# Altium PCB FMCWRadar.PcbDoc (part 2 of 5)
Units mil, origin at the board's own origin, x right, y up, seen from the top; angles counter-clockwise.
Board outline 4763.78 x 3464.57 mil, 6 copper layers (L1, L2(GND), L3, L4, L5(GND), L6), stack 32.112 mil thick; 306 components, 195 nets, 1057 pads, 1126 vias.
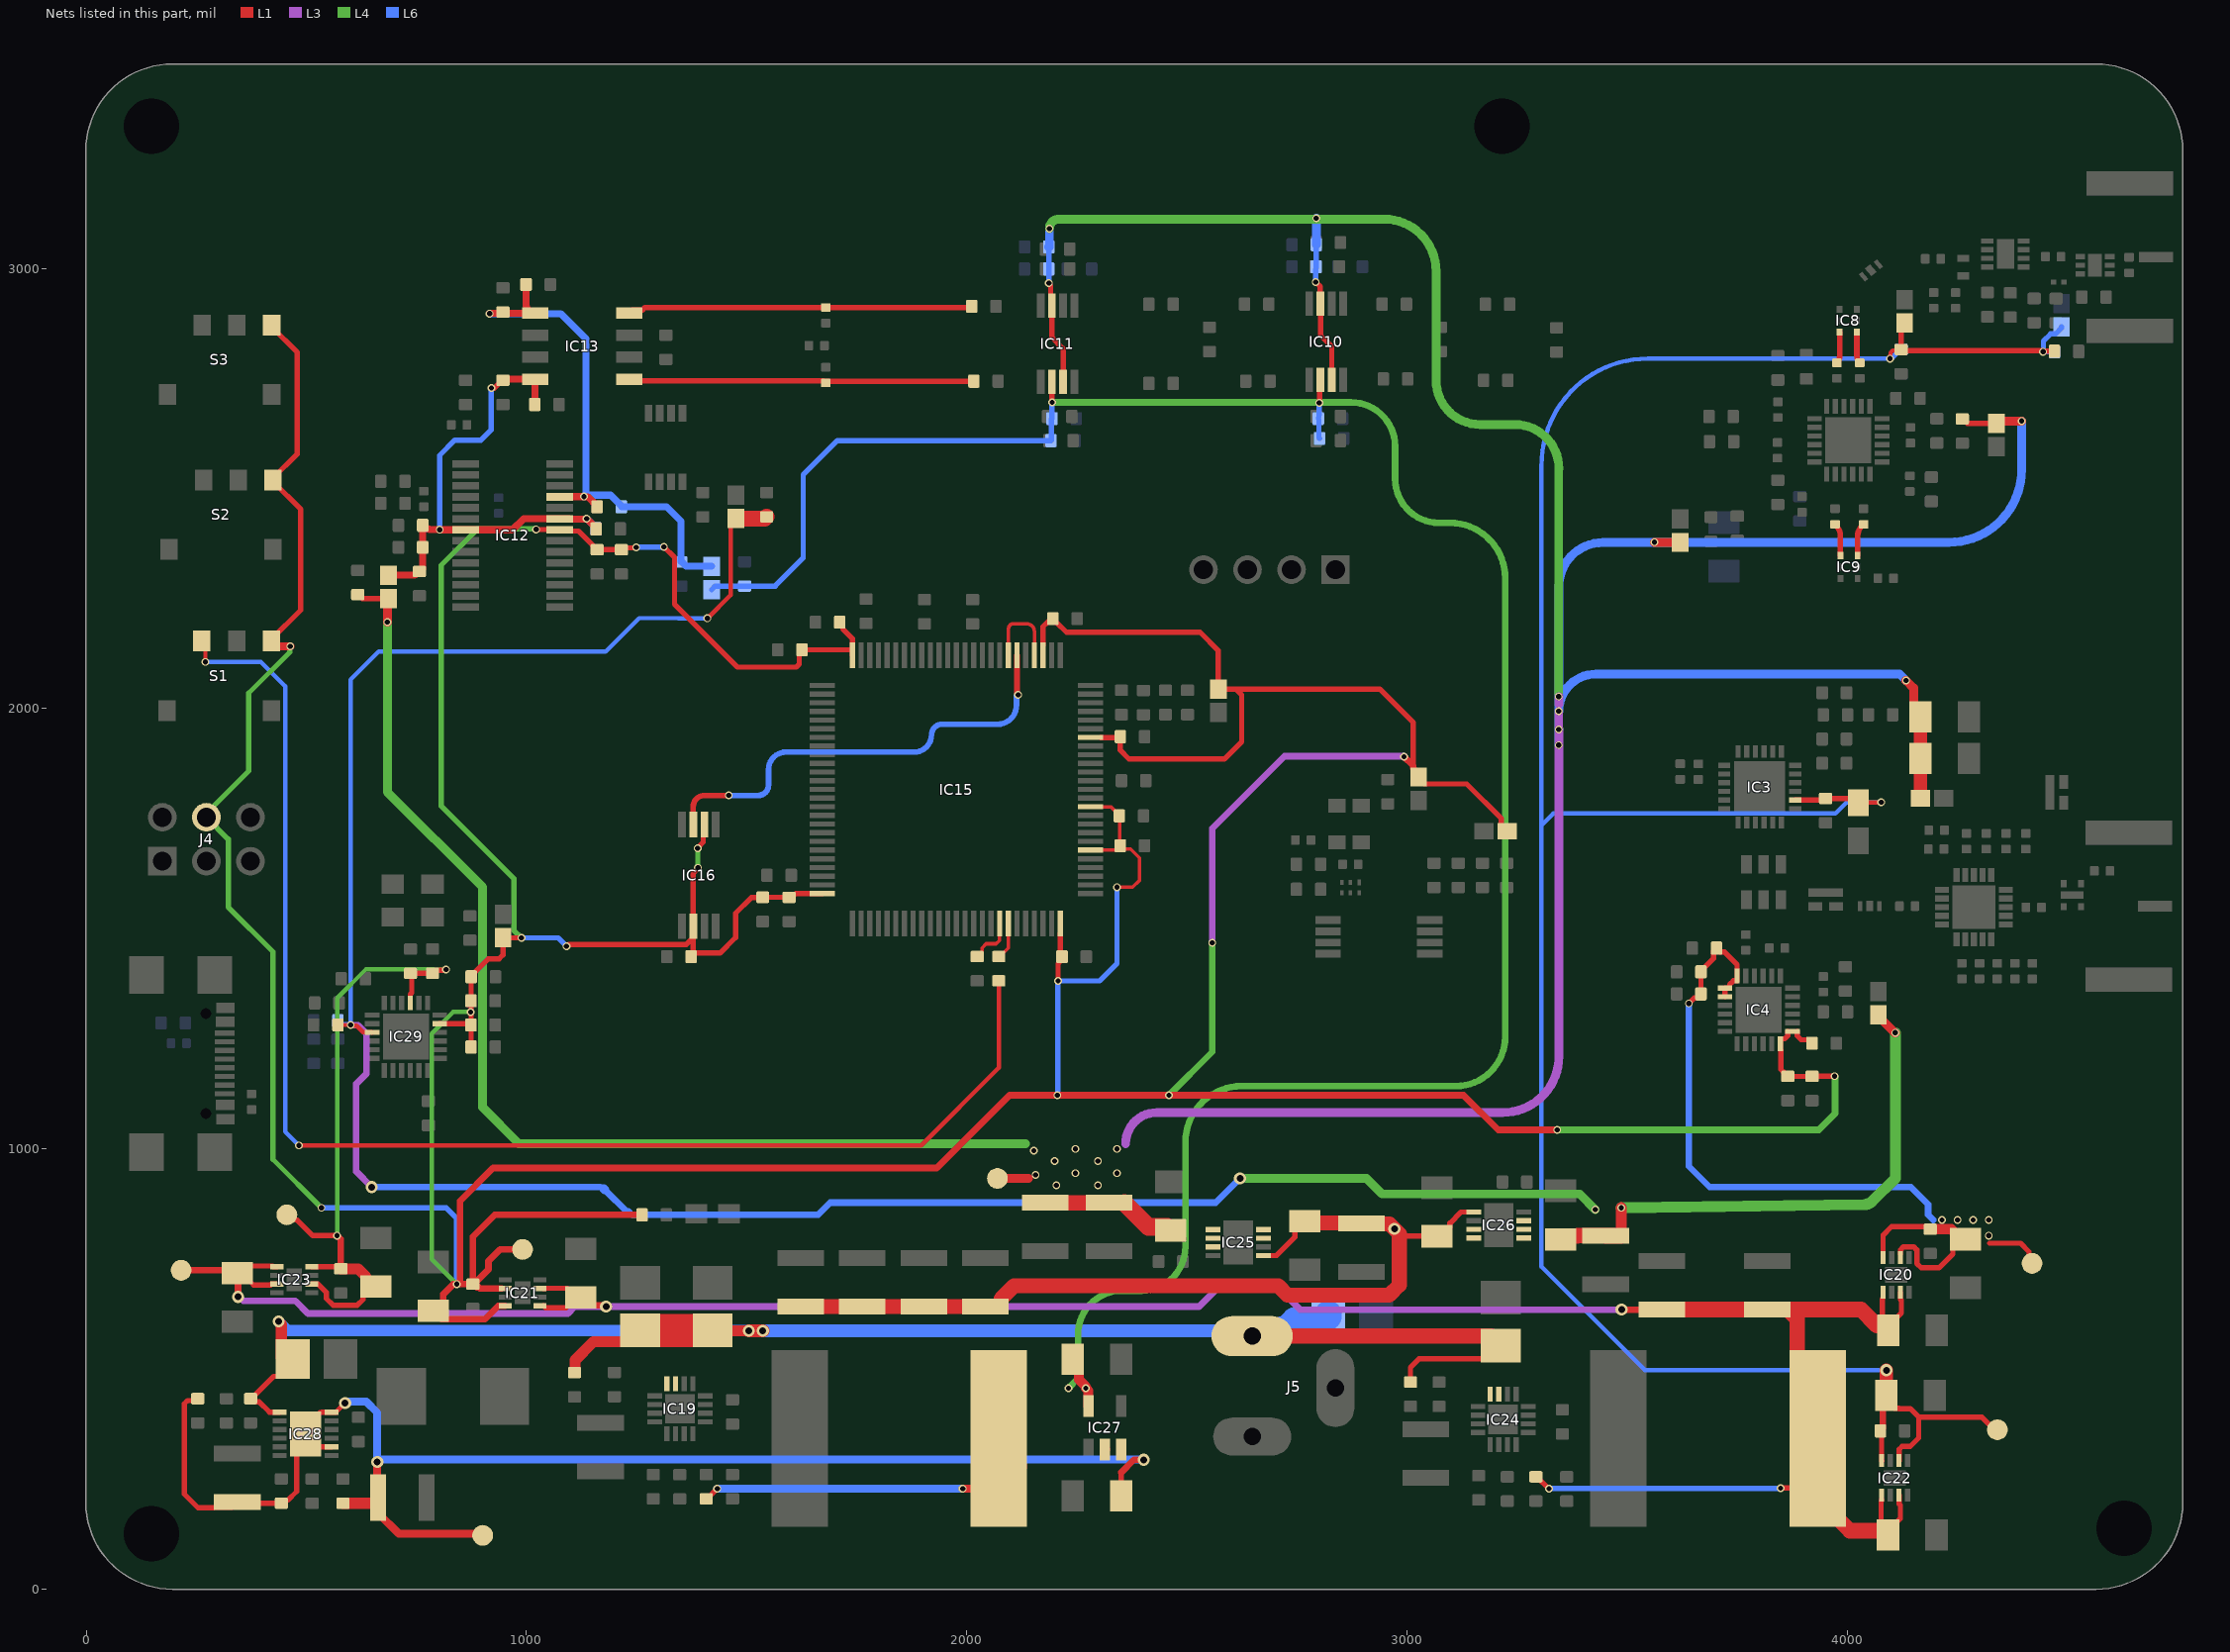
[diagram p6: the nets of this part, all layers, seen from the top]

## Part data (continued)
C14 C21 C22 C24 C25 C28 C30 C32 C37 C42 C43 C46 C47 C51 C52 C58 C74 C75 C78 C79 C82 C83 C84 C86 C89 C92 C95 C101 C102 C103 C104 C105 C106 C107 C108 C109 C116 C117 C119 C120 C123 C128 C148 C167 C171 C173 C175 C177 C179 C181: library part CMP-001-00055-4, "Chip Capacitor, 1µF +/-0.1%, 25V, 0603, Thickness 1 mm", Case/Package=0603, Manufacturer Part No=0603X104K250CT, Max Operating Temperature=85°C, Min Operating Temperature=-55°C, Mouser Part No=791-0603X104K250CT, Tolerance=20%, Voltage Rating=25V, Mounting Technology=SMT, Pins=2
C15 C23 C26: library part CMP-001-00055-4, "Chip Capacitor, 1µF +/-0.1%, 25V, 0603, Thickness 1 mm", Case/Package=0603, Manufacturer Part No=VJ0603A100JXBAP, Max Operating Temperature=85°C, Min Operating Temperature=-55°C, Mouser Part No=77-VJ0603A100JXBAP, Tolerance=20%, Voltage Rating=25V, Mounting Technology=SMT, Pins=2
C16: library part CMP-001-00042-7, "Tantalum Capacitors - Solid SMD 20V 4.7uF 1206 10% ESR=4ohms", Capacitor Type=Tantalum, Case/Package=1206, Manufacturer=AVX, Manufacturer Part No=T491A475K020AT, Max Operating Temperature=125°C, Min Operating Temperature=-55°C, Mouser Part No=80-T491A475K020, Package Description="2-Pin Surface Mount Device, Body 3.2 x 1.65 mm", Package Quantity=2000, Package Reference=TAJ-A-2, Resistance=4Ohm, Tolerance=10%, Voltage Rating=16V, Datasheet Version=Feb-16, ESR=4Ohm, Mounting Technology=SM, Packaging=TapeandReel, RoHS Compliant=True
C17 C133 C135 C141 C143: library part CMP-001-00055-4, "Multilayer Ceramic Capacitors MLCC - SMD/SMT 0603 10nF 16volts X7R 10%", Case/Package=0603, Manufacturer Part No=VJ0603Y103KXJAC31X, Max Operating Temperature=85°C, Min Operating Temperature=-55°C, Mouser Part No=77-V0603Y103KXJAC31X, Tolerance=20%, Voltage Rating=25V, Mounting Technology=SMT, Pins=2
C18: library part CMP-001-00055-4, "Multilayer Ceramic Capacitors MLCC - SMD/SMT Cap Cer 0603 12nF 16VDC X8G 1%", Case/Package=0603, Manufacturer Part No=C0603C123F4TACTU, Max Operating Temperature=85°C, Min Operating Temperature=-55°C, Mouser Part No=80-C0603C123F4TACTU, Tolerance=20%, Voltage Rating=25V, Mounting Technology=SMT, Pins=2
C19: library part CMP-001-00055-4, "Multilayer Ceramic Capacitors MLCC - SMD/SMT 10V .15uF X7R 0603 5 %", Case/Package=0603, Manufacturer Part No=0603ZC154JAT2A, Max Operating Temperature=85°C, Min Operating Temperature=-55°C, Mouser Part No=581-0603ZC154JAT2A, Tolerance=20%, Voltage Rating=25V, Mounting Technology=SMT, Pins=2
C20: library part CMP-001-00055-4, "Chip Capacitor, 1µF +/-0.1%, 25V, 0603, Thickness 1 mm", Case/Package=0603, Manufacturer Part No=06033C562JAT2A, Max Operating Temperature=85°C, Min Operating Temperature=-55°C, Mouser Part No=581-06033C562J, Tolerance=20%, Voltage Rating=25V, Mounting Technology=SMT, Pins=2
C27 C29 C31 C34 C41 C49 C50 C72 C73 C76 C77 C114 C115 C118 C121 C170 C172 C176 C180: library part CMP-001-00055-4, "Multilayer Ceramic Capacitors MLCC - SMD/SMT 0603 10nF 16volts X7R 10%", Case/Package=0603, Manufacturer Part No=VJ0603G225KXQCW1BC, Max Operating Temperature=85°C, Min Operating Temperature=-55°C, Mouser Part No=77-VJ0603G225KXQCWBC, Tolerance=20%, Voltage Rating=25V, Mounting Technology=SMT, Pins=2
C33 C62 C63 C70 C71: library part CMP-001-00055-4, "Chip Capacitor, 1µF +/-0.1%, 25V, 0603, Thickness 1 mm", Case/Package=0603, Manufacturer Part No=06033A101GAT2A, Max Operating Temperature=85°C, Min Operating Temperature=-55°C, Mouser Part No=581-06033A101GAT2A, Tolerance=20%, Voltage Rating=25V, Mounting Technology=SMT, Pins=2
C35: library part CMP-001-00071-4, "Multilayer Ceramic Capacitors MLCC - SMD/SMT 50 V 10 pF C0G 0402 1%", Case/Package=0402, Manufacturer Part No=CQ0402FRNPO9BN100, Max Operating Temperature=85°C, Min Operating Temperature=-55°C, Mouser Part No=603-CQ0402FRNPO9BN10, Tolerance=20%, Voltage Rating=50V, Mounting Technology=SMT, Pins=2
C36 C88 C122: library part CMP-001-00071-4, "Multilayer Ceramic Capacitors MLCC - SMD/SMT 50 V 10 pF C0G 0402 1%", Case/Package=0402, Manufacturer Part No=VJ0402Y103JXJAC, Max Operating Temperature=85°C, Min Operating Temperature=-55°C, Mouser Part No=77-VJ0402Y103JXJAC, Tolerance=20%, Voltage Rating=50V, Mounting Technology=SMT, Pins=2
C40: library part CMP-001-00071-4, "Multilayer Ceramic Capacitors MLCC - SMD/SMT 50 V 10 pF C0G 0402 1%", Case/Package=0402, Manufacturer Part No=04025A0R5BAT4A, Max Operating Temperature=85°C, Min Operating Temperature=-55°C, Mouser Part No=581-04025A0R5BAT4A, Tolerance=20%, Voltage Rating=50V, Mounting Technology=SMT, Pins=2
C55 C56: library part CMP-001-00055-4, "Multilayer Ceramic Capacitors MLCC - SMD/SMT 25V 0.082uF X7R 0603 5%", Case/Package=0603, Manufacturer Part No=C0603C823J3RACTU, Max Operating Temperature=85°C, Min Operating Temperature=-55°C, Mouser Part No=80-C0603C823J3R, Tolerance=20%, Voltage Rating=25V, Mounting Technology=SMT, Pins=2
C64 C67: library part CMP-001-00055-4, "Chip Capacitor, 1µF +/-0.1%, 25V, 0603, Thickness 1 mm", Case/Package=0603, Manufacturer Part No=VJ0603Y332JXBAC, Max Operating Temperature=85°C, Min Operating Temperature=-55°C, Mouser Part No=77-VJ0603Y332JXBAC, Tolerance=20%, Voltage Rating=25V, Mounting Technology=SMT, Pins=2
C65: library part CMP-001-00055-4, "Chip Capacitor, 1µF +/-0.1%, 25V, 0603, Thickness 1 mm", Case/Package=0603, Manufacturer Part No=C0603C271J1GACAUTO, Max Operating Temperature=85°C, Min Operating Temperature=-55°C, Mouser Part No=80-C0603C271J1GAUTO, Tolerance=20%, Voltage Rating=25V, Mounting Technology=SMT, Pins=2
C66: library part CMP-001-00055-4, "Chip Capacitor, 1µF +/-0.1%, 25V, 0603, Thickness 1 mm", Case/Package=0603, Manufacturer Part No=C0603C302K5GACTU, Max Operating Temperature=85°C, Min Operating Temperature=-55°C, Mouser Part No=80-C0603C302K5G, Tolerance=20%, Voltage Rating=25V, Mounting Technology=SMT, Pins=2
C68 C69 C80 C81 C85 C87 C91 C93 C94 C96 C110 C111 C174 C178: library part CMP-001-00055-4, "Chip Capacitor, 1µF +/-0.1%, 25V, 0603, Thickness 1 mm", Case/Package=0603, Manufacturer Part No=0603YC105KAZ2A, Max Operating Temperature=85°C, Min Operating Temperature=-55°C, Mouser Part No=581-0603YC105KAZ2A, Tolerance=20%, Voltage Rating=25V, Mounting Technology=SMT, Pins=2
C90 C97 C98 C99 C100: library part CMP-001-00055-4, "Chip Capacitor, 1µF +/-0.1%, 25V, 0603, Thickness 1 mm", Case/Package=0603, Manufacturer Part No=06033D475KAT2A, Max Operating Temperature=85°C, Min Operating Temperature=-55°C, Mouser Part No=581-06033D475KAT2A, Tolerance=20%, Voltage Rating=25V, Mounting Technology=SMT, Pins=2
C112 C113: library part CMP-001-00055-4, "Chip Capacitor, 1µF +/-0.1%, 25V, 0603, Thickness 1 mm", Case/Package=0603, Manufacturer Part No=C0603C475K8PAC7867, Max Operating Temperature=85°C, Min Operating Temperature=-55°C, Mouser Part No=80-C0603C475K8P7867, Tolerance=20%, Voltage Rating=25V, Mounting Technology=SMT, Pins=2
C124: library part CMP-001-00071-4, "Multilayer Ceramic Capacitors MLCC - SMD/SMT 50 V 3 pF 0.1 pF C0G (NP0) 0402 - 55 C + 125 C", Case/Package=0402, Manufacturer Part No=GRM155R71E223KA61D, Max Operating Temperature=85°C, Min Operating Temperature=-55°C, Mouser Part No=81-GRM155R71E223KA6D, Tolerance=20%, Voltage Rating=50V, Mounting Technology=SMT, Pins=2
C125 C126: library part CMP-001-00043-7, "Tantalum Capacitors - Solid SMD 20V 10uF 10% 1210 ES R = 2.1 Ohm", Capacitor Type=Tantalum, Case/Package=1210, Manufacturer=AVX, Manufacturer Part No=TAJB106K020SNJ, Max Operating Temperature=125°C, Min Operating Temperature=-55°C, Mouser Part No=581-TAJB106K020SNJ, Package Description="2-Pin Surface Mount Device, Body 3.5 x 2.85 mm", Package Quantity=2000, Package Reference=TAJ-B-2, Resistance=2.8Ohm, Tolerance=10%, Voltage Rating=16V, Datasheet URL=http://datasheets.avx.com/TAJ.pdf, Datasheet Version=Feb-16, ESR=2.8Ohm, Manufacturer URL=http://www.avx.com/, Mounting Technology=SM, Packaging=TapeandReel, Pins=2, RoHS Compliant=True
C127 C147 C159: library part CMP-001-00043-7, "Tantalum Capacitors - Solid SMD 20V 4.7uF 10% 1210 E SR= 3 Ohm", Capacitor Type=Tantalum, Case/Package=1210, Manufacturer=AVX, Manufacturer Part No=TAJB475K020RNJ, Max Operating Temperature=125°C, Min Operating Temperature=-55°C, Mouser Part No=581-TAJB475K020, Package Description="2-Pin Surface Mount Device, Body 3.5 x 2.85 mm", Package Quantity=2000, Package Reference=TAJ-B-2, Resistance=2.8Ohm, Tolerance=10%, Voltage Rating=16V, Datasheet URL=http://datasheets.avx.com/TAJ.pdf, Datasheet Version=Feb-16, ESR=2.8Ohm, Manufacturer URL=http://www.avx.com/, Mounting Technology=SM, Packaging=TapeandReel, Pins=2, RoHS Compliant=True
C129 C130 C131 C132 C149 C150 C153 C156 C157 C160 C163: library part 12105C475K4Z2A, "Multilayer Ceramic Capacitors MLCC - SMD/SMT 100V 2.2uF X7R 1210 5% AEC-Q200", Manufacturer Part No=C1210C106K6PACTU, Manufacturer_Name="Kyocera AVX", Mouser Part No=80-C1210C106K6P, Arrow Part Number=12105C475K4Z2A, Arrow Price/Stock=https://www.arrow.com/en/products/12105c475k4z2a/avx.html?utm_currency=USD&region=nac, Mouser Price/Stock=https://www.mouser.co.uk/ProductDetail/KYOCERA-AVX/12105C475K4Z2A?qs=1X9trZCrWl1tMuskY%2F55Eg%3D%3D
C134 C136 C137 C138 C142 C144 C145 C146 C154 C155 C161 C162 C164 C165: library part CMP-001-00016-6, "Chip Capacitor, 10 uF, +/- 10%, 16 V, 1206 (3216 Metric)", Capacitor Type=Ceramic, Case/Package=1206, Manufacturer Part No=CC1206KFX7R9BB475, Max Operating Temperature=125°C, Min Operating Temperature=-55°C, Mouser Part No=603-CC1206KFX7R9B475, Tolerance=10%, Voltage Rating=16V, Mounting Technology=SM, Pins=2, RoHS Compliant=True
C139 C151 C168: library part CMP-001-00055-4, "Chip Capacitor, 1µF +/-0.1%, 25V, 0603, Thickness 1 mm", Case/Package=0603, Manufacturer Part No=VJ0603Y153KXJAC31X, Max Operating Temperature=85°C, Min Operating Temperature=-55°C, Mouser Part No=77-V0603Y153KXJAC31X, Tolerance=20%, Voltage Rating=25V, Mounting Technology=SMT, Pins=2
C140 C152 C169: library part 12105C475K4Z2A, "Multilayer Ceramic Capacitors MLCC - SMD/SMT 100V 2.2uF X7R 1210 5% AEC-Q200", Manufacturer Part No=C1210C225J1RACAUTO, Manufacturer_Name="Kyocera AVX", Mouser Part No=80-C1210C225J1RAUTO, Arrow Part Number=12105C475K4Z2A, Arrow Price/Stock=https://www.arrow.com/en/products/12105c475k4z2a/avx.html?utm_currency=USD&region=nac, Mouser Price/Stock=https://www.mouser.co.uk/ProductDetail/KYOCERA-AVX/12105C475K4Z2A?qs=1X9trZCrWl1tMuskY%2F55Eg%3D%3D
C158 C166: library part CMP-001-00055-4, "Multilayer Ceramic Capacitors MLCC - SMD/SMT 0603 10nF 16volts X7R 10%", Case/Package=0603, Manufacturer Part No=06035C102J4T4A, Max Operating Temperature=85°C, Min Operating Temperature=-55°C, Mouser Part No=581-06035C102J4T4A, Tolerance=20%, Voltage Rating=25V, Mounting Technology=SMT, Pins=2
FB1 FB5: library part 742792662-FB, "FERRITE BEAD 0603", Case Code (Imperial)=0603, DC Resistance (DCR)=1000Ohm, Max Current Rating=2000mA, Max Operating Temperature=125°C, Min Operating Temperature=-55°C, Mouser Part No=710-742792625, Case/Package=0603, Manufacturer Part No=742792625, Mount="Surface Mount", Number of Lines=1, Packaging="Cut Tape"
FB2 FB6 FB7 FB8 FB9: library part 742792662-FB, "FERRITE BEAD 0603", Case Code (Imperial)=0603, DC Resistance (DCR)=1000Ohm, Max Current Rating=600mA, Max Operating Temperature=125°C, Min Operating Temperature=-55°C, Mouser Part No=710-742792662, Case/Package=0603, Manufacturer Part No=742792662, Mount="Surface Mount", Number of Lines=1, Packaging="Cut Tape"
FB3 FB4: library part 742792662-FB, "FERRITE BEAD 0603", Case Code (Imperial)=0603, DC Resistance (DCR)=1000Ohm, Max Current Rating=2000mA, Max Operating Temperature=125°C, Min Operating Temperature=-55°C, Mouser Part No=81-BLM18PG181SN1D, Case/Package=0603, Manufacturer Part No=BLM18PG181SN1D, Mount="Surface Mount", Number of Lines=1, Packaging="Cut Tape"
FB10 FB11 FB12 FB13: library part 742792662-FB, "FERRITE BEAD 0603", Case Code (Imperial)=0603, DC Resistance (DCR)=1000Ohm, Max Current Rating=600mA, Max Operating Temperature=125°C, Min Operating Temperature=-55°C, Mouser Part No=710-742863122, Case/Package=0603, Manufacturer Part No=742863122, Mount="Surface Mount", Number of Lines=1, Packaging="Cut Tape"
FL1 FL2: "Filter", Arrow Part Number=DEA165550BT-2322A1-H, Manufacturer_Name=TDK, Mouser Part No=810-DEA16555BT223C2H, Arrow Price/Stock=https://www.arrow.com/en/products/dea165550bt-2322a1-h/tdk?utm_currency=USD&region=nac, Datasheet Link=https://product.tdk.com/system/files/dam/doc/product/rf/rf/filter/catalog/rf_bpf_dea165550bt-2322a1-h_en.pdf, Height=0.65mm, Manufacturer Part No=DEA165550BT-2230C2-H, Mouser Price/Stock=https://www.mouser.co.uk/ProductDetail/TDK/DEA165550BT-2322A1-H?qs=t7xnP681wgVP2H2d%252Bwsz8A%3D%3D
IC1: "Integrated Circuit", Manufacturer_Name=Qorvo, Mouser Part No=772-QPA9501TR13, Datasheet Link=https://www.qorvo.com/products/d/da005897, Height=0.9mm, Manufacturer Part No=QPA9501TR13, Mouser Price/Stock=https://www.mouser.co.uk/ProductDetail/Qorvo/QPA9501TR13?qs=l%2FgYmo23PNM7tJLHqC3zeA%3D%3D
IC2: "Integrated Circuit", Manufacturer_Name=Mini-Circuits, Mouser Part No=139-SCN-2-65, Height=0.96mm, Manufacturer Part No=SCN-2-65+, Mouser Price/Stock=https://www.mouser.co.uk/ProductDetail/Mini-Circuits/QCN-45%2b?qs=xZ%2FP%252Ba9zWqYwP22V1vu4wA%3D%3D
IC3: "Integrated Circuit", Manufacturer_Name="Analog Devices", Mouser Part No=584-HMC431LP4E, Arrow Part Number=HMC431LP4E, Arrow Price/Stock=https://www.arrow.com/en/products/hmc431lp4e/analog-devices?region=europe, Datasheet Link=https://www.analog.com/media/en/technical-documentation/data-sheets/hmc431.pdf, Height=1mm, Manufacturer Part No=HMC431LP4E, Mouser Price/Stock=https://www.mouser.co.uk/ProductDetail/Analog-Devices/HMC431LP4E?qs=3izLlwrMQ7koKJkU3m2Tkw%3D%3D
IC4: library part ADF4158CCPZ-RL7, "Integrated Circuit", Manufacturer_Name="Analog Devices", Mouser Part No=584-ADF4158CCPZ, Arrow Part Number=ADF4158CCPZ-RL7, Arrow Price/Stock=https://www.arrow.com/en/products/adf4158ccpz-rl7/analog-devices?utm_currency=USD&region=nac, Datasheet Link=http://componentsearchengine.com/Datasheets/1/ADF4158CCPZ-RL7.pdf, Height=0.8mm, Manufacturer Part No=ADF4158CCPZ-RL7, Mouser Price/Stock=https://www.mouser.co.uk/ProductDetail/Analog-Devices/ADF4158CCPZ-RL7?qs=BpaRKvA4VqEwT1bDzGawgQ%3D%3D
IC5: "Integrated Circuit", Manufacturer_Name="Texas Instruments", Mouser Part No=595-TRF37A73IDSGR, Arrow Part Number=TRF37A73IDSGR, Arrow Price/Stock=https://www.arrow.com/en/products/trf37a73idsgr/texas-instruments?utm_currency=USD&region=europe, Datasheet Link=https://www.ti.com/lit/gpn/trf37a73, Height=0.8mm, Manufacturer Part No=TRF37A73IDSGR, Mouser Price/Stock=https://www.mouser.co.uk/ProductDetail/Texas-Instruments/TRF37A73IDSGR?qs=7z%252BmIopC6%2FLSVnZOjS1Ggg%3D%3D
IC6: "Integrated Circuit", Manufacturer_Name=Skyworks, Mouser Part No=873-SKY65404-31, Datasheet Link=https://labcenter.componentsearchengine.com/Datasheets/1/SKY65404-31.pdf, Height=0.5mm, Manufacturer Part No=SKY65404-31, Mouser Price/Stock=https://www.mouser.co.uk/ProductDetail/Skyworks-Solutions-Inc/SKY65404-31?qs=Qms%2F5q1u4ZO3Rpi9D7nTnA%3D%3D
IC7: "Integrated Circuit", Manufacturer Part No=ADL5801ACPZ-R7, Manufacturer_Name="Analog Devices", Mouser Part No=584-ADL5801ACPZ-R7, Datasheet Link=https://g.componentsearchengine.com/Datasheets/2/ADL5801ACPZ.pdf, Height=1mm, Mouser Price/Stock=https://www.mouser.co.uk/ProductDetail/Analog-Devices/ADL5801ACPZ?qs=%252BEew9%252B0nqrBhhLLfUJ8blg%3D%3D
IC8 IC9: "Integrated Circuit", Manufacturer_Name=ANAREN, Mouser Part No=609-5400BL15B0050001, Datasheet Link=https://cdn.anaren.com/product-documents/Xinger/PowerDividers/PD6080J5050S2HF/PD6080J5050S2HF_DataSheet(Rev_B).pdf, Height=0.48mm, Manufacturer Part No=5400BL15B0050001E, Mouser Price/Stock=https://www.mouser.com/Search/Refine.aspx?Keyword=620-PD6080J5050S2HF
IC10 IC11: "Integrated Circuit", Manufacturer_Name="Texas Instruments", Mouser Part No=595-THS4561IDGKT, Datasheet Link=http://www.ti.com/general/docs/suppproductinfo.tsp?distId=10&gotoUrl=http%3A%2F%2Fwww.ti.com%2Flit%2Fgpn%2Fths4561, Height=1.1mm, Manufacturer Part No=THS4561IDGKT, Mouser Price/Stock=https://www.mouser.co.uk/ProductDetail/Texas-Instruments/THS4561IDGKT?qs=YCa%2FAAYMW01gTL9xVldK5g%3D%3D
IC12: "Integrated Circuit", Manufacturer_Name="Analog Devices", Mouser Part No=584-LTC1420IGN#PBF, Arrow Part Number=LTC1420IGN#PBF, Arrow Price/Stock=https://www.arrow.com/en/products/ltc1420ignpbf/linear-technology, Datasheet Link=http://www.linear.com/docs/1071, Height=1.75mm, Manufacturer Part No=LTC1420IGN#PBF, Mouser Price/Stock=https://www.mouser.com/Search/Refine.aspx?Keyword=584-LTC1420IGN%23PBF
IC13: "Integrated Circuit", Manufacturer_Name="Texas Instruments", Mouser Part No=595-INA849DR, Arrow Part Number=INA849DR, Arrow Price/Stock=https://www.arrow.com/en/products/ina849dr/texas-instruments?utm_currency=USD&region=europe, Datasheet Link=https://www.ti.com/lit/ds/symlink/ina849.pdf?ts=1609495728489&ref_url=https%253A%252F%252Fwww.ti.com%252Fproduct%252FINA849, Height=1.75mm, Manufacturer Part No=INA849DR, Mouser Price/Stock=https://www.mouser.co.uk/ProductDetail/Texas-Instruments/INA849DR?qs=eP2BKZSCXI4qgDpsz1tg9g%3D%3D
IC14: "Integrated Circuit", Manufacturer_Name=Nexperia, Mouser Part No=771-AHCT2G125DP125, Arrow Part Number=74AHCT2G125DP,125, Arrow Price/Stock=https://www.arrow.com/en/products/74ahct2g125dp125/nexperia, Datasheet Link=https://assets.nexperia.com/documents/data-sheet/74AHC_AHCT2G125.pdf, Height=1.1mm, Manufacturer Part No=74AHCT2G125DP,125, Mouser Price/Stock=https://www.mouser.co.uk/ProductDetail/Nexperia/74AHCT2G125DP125?qs=P62ublwmbi%2FS7fXZumeLoQ%3D%3D
IC15: library part STM32F429VET6TR, "Integrated Circuit", Manufacturer_Name=STMicroelectronics, Mouser Part No=511-STM32F429VET6TR, Arrow Part Number=STM32F429VET6TR, Arrow Price/Stock=https://www.arrow.com/en/products/stm32f429vet6tr/stmicroelectronics?utm_currency=USD&region=nac, Datasheet Link=https://www.st.com/resource/en/datasheet/stm32f427vg.pdf, Height=1.6mm, Manufacturer Part No=STM32F429VET6TR, Mouser Price/Stock=https://www.mouser.co.uk/ProductDetail/STMicroelectronics/STM32F429VET6TR?qs=BA62vJVifGrUX4%252B8r82dRQ%3D%3D
IC16 IC17: "Integrated Circuit", Manufacturer_Name="Texas Instruments", Mouser Part No=595-LMK1C1102PWR, Arrow Part Number=LMK1C1102PWR, Arrow Price/Stock=https://www.arrow.com/en/products/lmk1c1102pwr/texas-instruments?utm_currency=USD&region=nac, Datasheet Link=https://www.ti.com/lit/gpn/LMK1C1102, Height=1.2mm, Manufacturer Part No=LMK1C1102PWR, Mouser Price/Stock=https://www.mouser.co.uk/ProductDetail/Texas-Instruments/LMK1C1102PWR?qs=rI7uf1IzohQAH976VttrBg%3D%3D
IC18: "Integrated Circuit", Manufacturer Part No=SN74LVC1G04DRY2, Manufacturer_Name="Texas Instruments", Mouser Part No=595-SN74LVC1G04DRY2, Arrow Part Number=SN74LVC1G04DRYR, Arrow Price/Stock=https://www.arrow.com/en/products/sn74lvc1g04dryr/texas-instruments?region=nac, Datasheet Link=http://www.ti.com/lit/gpn/sn74lvc1g04, Height=0mm, Mouser Price/Stock=https://www.mouser.co.uk/ProductDetail/Texas-Instruments/SN74LVC1G04DRYR?qs=7kv20MEVUlgyCI6MY8upNw%3D%3D
IC19: "Integrated Circuit", Manufacturer_Name="Analog Devices", Mouser Part No=700-MAX17632CATE+, Arrow Part Number=MAX17632CATE+, Arrow Price/Stock=https://www.arrow.com/en/products/max17632cate/analog-devices?utm_currency=USD&region=nac, Datasheet Link=https://www.analog.com/media/en/technical-documentation/data-sheets/MAX17632.pdf, Height=0.8mm, Manufacturer Part No=MAX17632CATE+, Mouser Price/Stock=https://www.mouser.co.uk/ProductDetail/Analog-Devices-Maxim-Integrated/MAX17632CATE%2b?qs=rrS6PyfT74fyPnhYKRDMtg%3D%3D
IC20 IC21 IC22 IC23: "Integrated Circuit", Manufacturer_Name="Analog Devices", Mouser Part No=700-MAX38902AATA+T, Arrow Part Number=MAX38902AATA+T, Arrow Price/Stock=https://www.arrow.com/en/products/max38902aatat/analog-devices?utm_currency=USD&region=nac, Datasheet Link=https://www.analog.com/MAX38902A/datasheet, Height=0.8mm, Manufacturer Part No=MAX38902AATA+T, Mouser Price/Stock=https://www.mouser.co.uk/ProductDetail/Analog-Devices-Maxim-Integrated/MAX38902AATA%2bT?qs=rrS6PyfT74ceu65lHXtPmw%3D%3D
IC24: "Switching Voltage Regulators For MAX17631C: 4.5V to 36V, 1.5A, High-E", Manufacturer_Name="Analog Devices", Mouser Part No=700-MAX17630CATE+, Datasheet Link=https://pdfserv.maximintegrated.com/package_dwgs/21-0136.PDF, Height=0.8mm, Manufacturer Part No=MAX17630CATE+, Mouser Price/Stock=https://www.mouser.co.uk/ProductDetail/Analog-Devices-Maxim-Integrated/MAX17630CATE%2b?qs=XeJtXLiO41TinQPE%252B2CXug%3D%3D
IC25: "Integrated Circuit", Manufacturer_Name="Analog Devices", Mouser Part No=584-ADM7172ACPZ5.0R7, Arrow Part Number=ADM7172ACPZ-5.0-R7, Arrow Price/Stock=https://www.arrow.com/en/products/adm7172acpz-5.0-r7/analog-devices?utm_currency=USD&region=nac, Datasheet Link=https://componentsearchengine.com/Datasheets/2/ADM7172ACPZ-5.0-R7.pdf, Height=0.8mm, Manufacturer Part No=ADM7172ACPZ-5.0-R7, Mouser Price/Stock=https://www.mouser.co.uk/ProductDetail/Analog-Devices/ADM7172ACPZ-5.0-R7?qs=iCT64eccu7gCprD3ZRgcTA%3D%3D
IC26: "Integrated Circuit", Manufacturer_Name="Analog Devices", Mouser Part No=584-ADM7170ACPZ5.0R7, Arrow Part Number=ADM7170ACPZ-5.0-R7, Arrow Price/Stock=https://www.arrow.com/en/products/adm7170acpz-5.0-r7/analog-devices.html?utm_currency=USD&region=nac, Datasheet Link=https://www.mouser.com/datasheet/2/609/ADM7170-1503220.pdf, Height=0.8mm, Manufacturer Part No=ADM7170ACPZ-5.0-R7, Mouser Price/Stock=https://www.mouser.co.uk/ProductDetail/Analog-Devices/ADM7170ACPZ-5.0-R7?qs=iCT64eccu7gt2itXdfapaA%3D%3D
IC27: "Integrated Circuit", Manufacturer_Name="Analog Devices", Mouser Part No=584-ADP7182AUJZ5.0R7, Arrow Part Number=ADP7182AUJZ-5.0-R7, Arrow Price/Stock=https://www.arrow.com/en/products/adp7182aujz-5.0-r7/analog-devices.html?utm_currency=USD&region=nac, Datasheet Link=https://www.analog.com/media/en/technical-documentation/data-sheets/ADP7182.pdf, Height=1mm, Manufacturer Part No=ADP7182AUJZ-5.0-R7, Mouser Price/Stock=https://www.mouser.co.uk/ProductDetail/Analog-Devices/ADP7182AUJZ-5.0-R7?qs=J50fqX%2Fl9ioiLvDNRlnZkg%3D%3D
IC28: "Integrated Circuit", Manufacturer_Name="Analog Devices", Mouser Part No=700-MAX17579ATC+, Arrow Part Number=MAX17579ATC+, Arrow Price/Stock=null?utm_currency=USD&region=nac, Datasheet Link=https://datasheets.maximintegrated.com/en/ds/MAX17579-MAX17580.pdf, Height=0.8mm, Manufacturer Part No=MAX17579ATC+, Mouser Price/Stock=https://www.mouser.co.uk/ProductDetail/Analog-Devices-Maxim-Integrated/MAX17579ATC%2b?qs=TuK3vfAjtkVNUN7nmSqbCQ%3D%3D
IC29: "Integrated Circuit", Manufacturer_Name=Microchip, Mouser Part No=886-USB3317C-CP-TR, Arrow Part Number=USB3317C-CP-TR, Arrow Price/Stock=https://www.arrow.com/en/products/usb3317c-cp-tr/microchip-technology?region=nac, Datasheet Link=http://www.microchip.com/mymicrochip/filehandler.aspx?ddocname=en562028, Height=1mm, Manufacturer Part No=USB3317C-CP-TR, Mouser Price/Stock=https://www.mouser.co.uk/ProductDetail/Microchip-Technology/USB3317C-CP-TR?qs=pA5MXup5wxGaIwrlfVA7Qw%3D%3D
J1 J2: library part CMP-381-000000-3, Mouser Part No=710-60312202114514, Package=None, Availability=Unavailable, Component Type=Standard, Design Item ID=60312202114514, Manufacturer Part No=60312202114514, MF="{'manufacturer': u'W\xfcrth Elektronik'}", Pin Count=5, Price=None, Source=60312202114514.SchLib
J3: "Connector", Manufacturer_Name=XFCN, Datasheet Link=https://datasheet.lcsc.com/lcsc/2003141432_XFCN-PZ254V-11-04P_C492403.pdf, Height=8.9mm, Manufacturer Part No=PZ254V-11-04P
J4: "Connector", Manufacturer_Name=SAMTEC, Mouser Part No=200-HTSW10307GD, Arrow Part Number=HTSW-103-07-G-D, Arrow Price/Stock=https://www.arrow.com/en/products/htsw-103-07-g-d/samtec?utm_currency=USD&region=nac, Datasheet Link=http://suddendocs.samtec.com/catalog_english/htsw_th.pdf, Height=8.38mm, Manufacturer Part No=HTSW-103-07-G-D, Mouser Price/Stock=https://www.mouser.co.uk/ProductDetail/Samtec/HTSW-103-07-G-D?qs=XtX6y9BSeMi36iVhWsAjLA%3D%3D
J5: "Connector", Manufacturer_Name="Wurth Elektronik", Mouser Part No=710-694106301002, Datasheet Link=https://www.we-online.com/catalog/datasheet/694106301002.pdf, Height=11mm, Manufacturer Part No=694106301002, Mouser Price/Stock=https://www.mouser.co.uk/ProductDetail/Wurth-Elektronik/694106301002?qs=a9WhcLg8qCwOEkcI62k5mA%3D%3D
J6: "USB Connectors USB Type C, 2.0, 16P, Receptacle, Horizontal, Top Mount, SMT,T&R", Manufacturer_Name="GCT (GLOBAL CONNECTOR TECHNOLOGY)", Mouser Part No=640-USB4940-00-A, Datasheet Link=https://gct.co/download?type=PDFDrawing&name=USB4940.pdf, Height=3.46mm, Manufacturer Part No=USB4940-00-A
L1: library part LQP03HQ0N6C02D, "Inductor", Manufacturer_Name="Murata Electronics", Mouser Part No=81-LQP03HQ0N6C02D, Datasheet Link=https://search.murata.co.jp/Ceramy/image/img/P02/JELF243C-0021.pdf, Height=0.42mm, Manufacturer Part No=LQP03HQ0N6C02D
L2: "Inductor", Manufacturer_Name="Murata Electronics", Mouser Part No=81-LQW15AN9N9J80D, Datasheet Link=https://search.murata.co.jp/Ceramy/image/img/P02/JELF243A-0100.pdf, Height=0.6mm, Manufacturer Part No=LQW15AN9N9J80D
L3: library part IHLP5050FDER7R8M5A, "Inductor", Manufacturer_Name=Vishay, Mouser Part No=70-IHLP5050FDR7R8M5A, Datasheet Link=https://www.vishay.com/docs/34337/ihlp-5050fd-5a.pdf, Height=6.4mm, Manufacturer Part No=IHLP5050FDER7R8M5A, Mouser Price/Stock=https://www.mouser.co.uk/ProductDetail/Vishay-Dale/IHLP5050FDER7R8M5A?qs=tDDpbAIEejqcE088n9SrNw%3D%3D
L4: library part IHLP5050FDER4R7M5A, "Inductor", Manufacturer_Name=Vishay, Mouser Part No=70-IHLP5050FDR4R7M5A, Arrow Part Number=IHLP5050FDER4R7M5A, Arrow Price/Stock=https://www.arrow.com/en/products/ihlp5050fder4r7m5a/vishay?region=nac, Datasheet Link=https://www.arrow.com/en/products/ihlp5050fder4r7m5a/vishay?region=nac, Height=6.4mm, Manufacturer Part No=IHLP5050FDER4R7M5A, Mouser Price/Stock=https://www.mouser.co.uk/ProductDetail/Vishay-Dale/IHLP5050FDER4R7M5A?qs=tDDpbAIEejrTl7lwUHZ91g%3D%3D
L5: library part SPM7054VC-6R8M-D, "Inductor", Manufacturer_Name=TDK, Mouser Part No=810-SPM7054VC-6R8M-D, Datasheet Link=https://product.tdk.com/system/files/dam/doc/product/inductor/inductor/smd/catalog/inductor_automotive_power_spm7054vc-d_en.pdf, Height=5.4mm, Manufacturer Part No=SPM7054VC-6R8M-D, Mouser Price/Stock=https://www.mouser.co.uk/ProductDetail/TDK/SPM7054VC-6R8M-D?qs=t7xnP681wgUOSFNjNlUlgg%3D%3D
LED1: "LED", Manufacturer_Name=Lite-On, Mouser Part No=859-LTST-C171KRKT, Arrow Part Number=LTST-C171KRKT, Arrow Price/Stock=https://www.arrow.com/en/products/ltst-c171krkt/lite-on-technology?utm_currency=USD&region=nac, Datasheet Link=http://www.mouser.com/datasheet/2/239/Lite-On-LTST-C171KRKT-1175280.pdf, Height=0.9mm, Manufacturer Part No=LTST-C171KRKT, Mouser Price/Stock=https://www.mouser.co.uk/ProductDetail/LITEON/LTST-C171KRKT?qs=5XMAZBf2SiSTcAb1f5vDzw%3D%3D
P1: Mouser Part No=620-X4C60J1-20G, Manufacturer Part No=X4C60J1-20G
R1: library part CMP-009-00097-2, "Thick Film Resistors - SMD 1/10 Watt 5.1Kohms 1%", Case/Package=0402, Manufacturer Part No=CRCW040227R0JNED, Mouser Part No=71-CRCW0402J-27-E3, Power=100mW, Tolerance=1%, Mounting Technology=SMT, Pins=2
R2 R3: library part CMP-009-00097-2, "Thick Film Resistors - SMD 2 Ohms 50 V 200 mW (1/5 W) 1 mmx0.5 mmx0.35 mm - 55 C+ 155 C", Case/Package=0402, Manufacturer Part No=ERJ-PA2J2R0X, Mouser Part No=667-ERJ-PA2J2R0X, Power=100mW, Tolerance=1%, Mounting Technology=SMT, Pins=2
R4 R12 R13 R28 R29 R31: library part CMP-009-00097-2, "Thin Film Resistors - SMD 49.9 OHM .1% 50PPM 1/16W", Case/Package=0402, Manufacturer Part No=RT0402BRE0749R9L, Mouser Part No=603-RT0402BRE0749R9L, Power=100mW, Tolerance=1%, Mounting Technology=SMT, Pins=2
R5: library part CMP-009-00097-2, "Thin Film Resistors - SMD 0402 0.1% 15ppm 27.4Kohm AEC-Q200", Case/Package=0402, Manufacturer Part No=ERA-2VPB2742X, Mouser Part No=667-ERA-2VPB2742X, Power=100mW, Tolerance=1%, Mounting Technology=SMT, Pins=2
R6: library part CMP-009-00097-2, "Thick Film Resistors - SMD 1/10 Watt 5.1Kohms 1%", Case/Package=0402, Manufacturer Part No=CRCW040245R3FKEDC, Mouser Part No=71-CRCW040245R3FKEDC, Power=100mW, Tolerance=1%, Mounting Technology=SMT, Pins=2
R7: library part CMP-009-00069-2, "Thick Film Resistors - SMD General Purpose Chip Resistor 0603, 200Ohms, 1%, 1/10W", Case/Package=0603, Manufacturer Part No=RC0603FR-10200RL, Mouser Part No=603-RC0603FR-10200RL, Power=100mW, Tolerance=5%, Mounting Technology=SMT, Pins=2
R8 R60 R61: library part CMP-009-00097-2, "Thick Film Resistors - SMD 1/10 Watt 5.1Kohms 1%", Case/Package=0402, Manufacturer Part No=CRCW04025K10FKED, Mouser Part No=71-CRCW0402-5.1K-E3, Power=100mW, Tolerance=1%, Mounting Technology=SMT, Pins=2
R9 R11: library part CMP-009-00069-2, "Thick Film Resistors - SMD WRIS-RSKS 100 Ohms 1 % 0.1 W 0603 AEC-Q200", Case/Package=0603, Manufacturer Part No=560112116009, Mouser Part No=710-560112116009, Power=100mW, Tolerance=5%, Mounting Technology=SMT, Pins=2
R10: library part CMP-009-00097-2, "Thick Film Resistors - SMD 1/10 Watt 5.1Kohms 1%", Case/Package=0402, Manufacturer Part No=CRCW040227R0JNTD, Mouser Part No=71-CRCW0402J-27, Power=100mW, Tolerance=1%, Mounting Technology=SMT, Pins=2
R14: library part CMP-009-00069-2, "Thick Film Resistors - SMD General Purpose Chip Resistor 0603, 200Ohms, 1%, 1/10W", Case/Package=0603, Manufacturer Part No=RT0603BRD07665RL, Mouser Part No=603-RT0603BRD07665RL, Power=100mW, Tolerance=5%, Mounting Technology=SMT, Pins=2
R15 R26: library part CMP-009-00069-2, "Thick Film Resistors - SMD WRIS-RSKS 100 Ohms 1 % 0.1 W 0603 AEC-Q200", Case/Package=0603, Manufacturer Part No=CR0603-FX-8201ELF, Mouser Part No=652-CR0603FX-8201ELF, Power=100mW, Tolerance=5%, Mounting Technology=SMT, Pins=2
R16 R27: library part CMP-009-00069-2, "Thick Film Resistors - SMD WRIS-RSKS 100 Ohms 1 % 0.1 W 0603 AEC-Q200", Case/Package=0603, Manufacturer Part No=RT0603BRE071K6L, Mouser Part No=603-RT0603BRE071K6L, Power=100mW, Tolerance=5%, Mounting Technology=SMT, Pins=2
R17 R22: library part CMP-009-00069-2, "Thick Film Resistors - SMD WRIS-RSKS 100 Ohms 1 % 0.1 W 0603 AEC-Q200", Case/Package=0603, Manufacturer Part No=CRCW06033K60FKTA, Mouser Part No=71-CRCW0603-3.6K, Power=100mW, Tolerance=5%, Mounting Technology=SMT, Pins=2
R18 R23: library part CMP-009-00069-2, "Thick Film Resistors - SMD WRIS-RSKS 100 Ohms 1 % 0.1 W 0603 AEC-Q200", Case/Package=0603, Manufacturer Part No=RC0603FR-7W2K4L, Mouser Part No=603-RC0603FR-7W2K4L, Power=100mW, Tolerance=5%, Mounting Technology=SMT, Pins=2
R19 R24: library part CMP-009-00069-2, "Thick Film Resistors - SMD WRIS-RSKS 100 Ohms 1 % 0.1 W 0603 AEC-Q200", Case/Package=0603, Manufacturer Part No=CR0603-JW-681ELF, Mouser Part No=652-CR0603JW-681ELF, Power=100mW, Tolerance=5%, Mounting Technology=SMT, Pins=2
R20 R25: library part CMP-009-00069-2, "Thick Film Resistors - SMD WRIS-RSKS 100 Ohms 1 % 0.1 W 0603 AEC-Q200", Case/Package=0603, Manufacturer Part No=CR0603-JW-471ELF, Mouser Part No=652-CR0603JW-471ELF, Power=100mW, Tolerance=5%, Mounting Technology=SMT, Pins=2
R21: library part CMP-009-00069-2, "Thick Film Resistors - SMD WRIS-RSKS 100 Ohms 1 % 0.1 W 0603 AEC-Q200", Case/Package=0603, Manufacturer Part No=CR0603-JW-361ELF, Mouser Part No=652-CR0603JW-361ELF, Power=100mW, Tolerance=5%, Mounting Technology=SMT, Pins=2
R30: library part CMP-009-00069-2, "Thick Film Resistors - SMD General Purpose Chip Resistor 0603, 200Ohms, 1%, 1/10W", Case/Package=0603, Manufacturer Part No=RT0603BRD0727RL, Mouser Part No=603-RT0603BRD0727RL, Power=100mW, Tolerance=5%, Mounting Technology=SMT, Pins=2
R32: library part CMP-009-00069-2, "Thick Film Resistors - SMD WRIS-RSKS 100 Ohms 1 % 0.1 W 0603 AEC-Q200", Case/Package=0603, Manufacturer Part No=CR0603-JW-152ELF, Mouser Part No=652-CR0603-JW-152ELF, Power=100mW, Tolerance=5%, Mounting Technology=SMT, Pins=2
R33 R34: library part CMP-009-00097-2, "Thick Film Resistors - SMD 0 Ohms 1/16 W 50 V 5 % 0402 - 55 C / + 155 C AEC-Q200", Case/Package=0402, Manufacturer Part No=AC0402JR-7D0RL, Mouser Part No=603-AC0402JR-7D0RL, Power=100mW, Tolerance=1%, Mounting Technology=SMT, Pins=2
R35 R36 R40 R41: library part CMP-009-00069-2, "Thin Film Resistors - SMD 0603 40kOhms 0.1% 25 PPM 100mW AECQ200", Case/Package=0603, Manufacturer Part No=AT0603BRD0740KL, Mouser Part No=603-AT0603BRD0740KL, Power=100mW, Tolerance=5%, Mounting Technology=SMT, Pins=2
R37: library part CMP-009-00069-2, "Thin Film Resistors - SMD RN 0603 8K06 0.1% 10PPM", Case/Package=0603, Manufacturer Part No=TNPW06031K00FHTA, Mouser Part No=71-TNPW06031K00FHTA, Power=100mW, Tolerance=5%, Mounting Technology=SMT, Pins=2
R38 R39: library part CMP-009-00069-2, "Thick Film Resistors - SMD General Purpose Chip Resistor 0603, 200Ohms, 1%, 1/10W", Case/Package=0603, Manufacturer Part No=CR0603-JW-474ELF, Mouser Part No=652-CR0603JW-474ELF, Power=100mW, Tolerance=5%, Mounting Technology=SMT, Pins=2
R42 R47: library part CMP-009-00069-2, "Thick Film Resistors - SMD General Purpose Chip Resistor 0603, 200Ohms, 1%, 1/10W", Case/Package=0603, Manufacturer Part No=CR0603-FX-7502ELF, Mouser Part No=652-CR0603FX-7502ELF, Power=100mW, Tolerance=5%, Mounting Technology=SMT, Pins=2
R43 R48 R52: library part CMP-009-00069-2, "Thick Film Resistors - SMD 3.3 MOhms 100 mW (1/10 W) 0603 1 % AEC-Q200", Case/Package=0603, Manufacturer Part No=AF0603FR-073M3L, Mouser Part No=603-AF0603FR-073M3L, Power=100mW, Tolerance=5%, Mounting Technology=SMT, Pins=2
R44: library part CMP-009-00069-2, "Thick Film Resistors - SMD General Purpose Chip Resistor 0603, 200Ohms, 1%, 1/10W", Case/Package=0603, Manufacturer Part No=RT0603BRE0713K7L, Mouser Part No=603-RT0603BRE0713K7L, Power=100mW, Tolerance=5%, Mounting Technology=SMT, Pins=2
R45 R50 R54: library part CMP-009-00069-2, "Thick Film Resistors - SMD General Purpose Chip Resistor 0603, 200Ohms, 1%, 1/10W", Case/Package=0603, Manufacturer Part No=CRCW0603511KFKEAC, Mouser Part No=71-CRCW0603511KFKEAC, Power=100mW, Tolerance=5%, Mounting Technology=SMT, Pins=2
R46: library part CMP-009-00069-2, "Thick Film Resistors - SMD General Purpose Chip Resistor 0603, 200Ohms, 1%, 1/10W", Case/Package=0603, Manufacturer Part No=AF0603FR-0733K2L, Mouser Part No=603-AF0603FR-0733K2L, Power=100mW, Tolerance=5%, Mounting Technology=SMT, Pins=2
R49: library part CMP-009-00069-2, "Thick Film Resistors - SMD General Purpose Chip Resistor 0603, 200Ohms, 1%, 1/10W", Case/Package=0603, Manufacturer Part No=CR0603-FX-2102ELF, Mouser Part No=652-CR0603FX-2102ELF, Power=100mW, Tolerance=5%, Mounting Technology=SMT, Pins=2
R51: library part CMP-009-00069-2, "Thick Film Resistors - SMD General Purpose Chip Resistor 0603, 200Ohms, 1%, 1/10W", Case/Package=0603, Manufacturer Part No=RT0603DRE0719K6L, Mouser Part No=603-RT0603DRE0719K6L, Power=100mW, Tolerance=5%, Mounting Technology=SMT, Pins=2
R53 R59: library part CMP-009-00069-2, "Thin Film Resistors - SMD RN 0603 8K06 0.1% 10PPM", Case/Package=0603, Manufacturer Part No=RN73C1J8K06BTDF, Mouser Part No=279-RN73C1J8K06BTDF, Power=100mW, Tolerance=5%, Mounting Technology=SMT, Pins=2
R55: library part CMP-009-00069-2, "Thick Film Resistors - SMD General Purpose Chip Resistor 0603, 200Ohms, 1%, 1/10W", Case/Package=0603, Manufacturer Part No=RT0603DRE0743K2L, Mouser Part No=603-RT0603DRE0743K2L, Power=100mW, Tolerance=5%, Mounting Technology=SMT, Pins=2
R56: library part CMP-009-00069-2, "Thick Film Resistors - SMD General Purpose Chip Resistor 0603, 200Ohms, 1%, 1/10W", Case/Package=0603, Manufacturer Part No=CRCW060344K2FKTA, Mouser Part No=71-CRCW0603-44.2K, Power=100mW, Tolerance=5%, Mounting Technology=SMT, Pins=2
R57: library part CMP-009-00069-2, "Thin Film Resistors - SMD CHIP RESISTOR Precision", Case/Package=0603, Manufacturer Part No=CRT0603-FY-1002ELF, Mouser Part No=652-CRT0603FY1002ELF, Power=100mW, Tolerance=5%, Mounting Technology=SMT, Pins=2
R58: library part CMP-009-00069-2, "Thick Film Resistors - SMD 1/10Watt 39ohms 1% Commercial Use", Case/Package=0603, Manufacturer Part No=CRCW060339R0FKEAC, Mouser Part No=71-CRCW060339R0FKEAC, Power=100mW, Tolerance=5%, Mounting Technology=SMT, Pins=2
S1 S2 S3: "Switch", Manufacturer Part No=SS3NP-MS-V-T/R, Manufacturer_Name=Diptronics, Mouser Part No=113-SS3NPMSVT/R, Datasheet Link=https://www.mouser.com/ProductDetail/Diptronics/SS3NP-MS-V-T-R?qs=wnTfsH77Xs43ZPFww1D6Kg%3D%3D&srsltid=AfmBOopqx-7fEiMbA5RDuUeWNOrYz02h2Sdq_sHLlEU3A8H4MvLuK0aE, Height=5mm, Mouser Price/Stock=https://www.mouser.co.uk/ProductDetail/Diptronics/SS3NP-MS-V-T-R?qs=wnTfsH77Xs43ZPFww1D6Kg%3D%3D
Y1: "Crystal or Oscillator", Manufacturer Part No="TG2520SMN 20.0000M-MCGNNM3", Manufacturer_Name="Epson Timing", Mouser Part No=732-TG252S2MCGNNM3, Datasheet Link=https://www.mouser.com/datasheet/2/137/Epson_TG2016SMN_en_1649545-1889946.pdf, Height=0.8mm, Mouser Price/Stock=https://www.mouser.co.uk/ProductDetail/Epson-Timing/TG2520SMN-20.0000M-ECGNNM3?qs=GBLSl2AkirtiulsX1IrWFQ%3D%3D
Y2: library part CMP-299-000000-2, "26 MHz XO (Standard) CMOS Oscillator 1.8V ~ 3.3V Enable/Disable 4-SMD, No Lead", Package="ECS-3225MVLC-0-4 ECS", Check_prices=https://www.snapeda.com/parts/ECS-3225MVLC-260-CN-TR/ECS/view-part/?ref=eda, Component Type=Standard, ComponentLink1Description=Datasheet, ComponentLink2Description="DigiKey Link", Design Item ID=ECS-3225MVLC-260-CN-TR, MF="ECS Inc.", MP=ECS-3225MVLC-260-CN-TR, Pin Count=4, SnapEDA_Link=https://www.snapeda.com/parts/ECS-3225MVLC-260-CN-TR/ECS/view-part/?ref=snap, Source=ECS-3225MVLC-260-CN-TR.SchLib

## Free pads (board coordinates)
  round 0 hole 125.98 unplated: 12(148.64,125.46) 12(148.64,3322.31) 12(3216.04,3322.29) 12(4628.96,137.27)
  round 47.24 smd paste-23.62: 13(900.61,121.52) 14(991.16,771.13) 15(455.73,849.87) 16(215.57,723.88) 18(2069.9,932.54) 19(4420.3,739.63) 20(4341.56,361.68)

## Via types
v1: diameter 17.72, hole 11.81, L1 to L6, tented both sides, 692 vias
v2: diameter 15.75, hole 11.81, L1 to L6, tented both sides, 386 vias
v3: diameter 27.56, hole 15.75, L1 to L6, tented both sides, 44 vias
v4: diameter 27.56, hole 11.81, L1 to L6, tented both sides, 3 vias
v5: diameter 23.62, hole 13.78, L1 to L6, tented both sides, 1 vias

## Nets (pads, with @x,y where several pads share a name; then routed paths per layer and width w, separated by ;. In a path a pad name is that pad's centre, name@x,y a point inside that pad or via, vN(x,y) a via of type N, cw(c..) or ccw(c..) an arc to the next point about the centre after c; other vN are vias at no path point)
+1V8D: C143.2 C144.2 C170.1 C171.2 IC23.6 IC23.8 IC29.21 pad.15 | length 1539.1
  L1 w12: pad.15@455.73,849.87 465.27,849.87 476.79,838.34 479.07,838.34 514.79,802.62 v1(569.9,802.62) ; IC23.6@512.03,692.47 512.13,692.37 526.61,692.37 545.39,673.59 545.39,659.92 560.71,644.61 615.86,644.61 628.86,657.6 628.86,667.44 648.45,687.03 C144.2@658.29,687.03 ; IC23.8@512.03,731.84 512.13,731.74 573.82,731.74 C143.2@578.29,727.27 ; IC29.21@736.13,1331.09 736.22,1331.18 736.22,1350.99 739.7,1354.47 739.7,1395.58 C170.1@736.75,1398.53 C171.2@786.76,1398.53 793.76,1405.53 814.14,1405.53 815.89,1407.27 v1(817.43,1407.27)
  L1 w15: v1(569.9,802.62) 578.29,794.24 C143.2@578.29,727.27
  L1 w25: C143.2@578.29,727.27 618.05,727.27 635.36,709.97 635.36,700.12 C144.2@648.45,687.03
  L4 w10: v1(569.9,802.62) 570.28,803 570.28,1342.37 635.18,1407.27 v1(817.43,1407.27)
+3V3A: C21.2 C22.2 C23.2 C133.2 C134.2 IC4.6 IC4.7 IC4.8 IC20.6 IC20.8 pad.19 | length 1919.2
  L1 w12: v1(3640.71,1330.18) v1(3640.71,1330.18) 3653.32,1342.73 3661.19,1342.73 3668.19,1349.73 C23.2@3668.19,1351.69 C22.2@3668.19,1401.69 3668.19,1403.65 3696.75,1432.21 3696.75,1448.69 C21.2@3703.75,1455.69 ; C21.2@3703.75,1453.73 3710.75,1446.73 3721.85,1446.73 3750.11,1418.47 3750.11,1392.4 IC4.6@3750.21,1392.3 3750.21,1381.66 3750.11,1381.57 3741.97,1381.57 3733.38,1372.98 3733.38,1364.84 3733.29,1364.74 IC4.7@3722.65,1364.74 IC4.8@3722.65,1345.06 ; IC20.8@4081.94,752.78 4082.04,752.87 4082.04,803.56 4101.62,823.14 4182.93,823.14 C133.2@4189.04,817.03 ; IC20.6@4121.41,761.54 4121.41,770.01 4128.44,777.04 4151.79,777.04 4158.82,770.01 4158.82,739.69 4169.04,729.47 4209.04,729.47 4240.36,760.79 4240.36,775 4259.95,794.59 C134.2@4269.04,794.59 ; 4323.56,785.19 4394.11,785.19 4413.55,765.74 4413.55,746.37 pad.19@4420.3,739.63
  L1 w23.82: C133.2@4189.04,817.03 4236.75,817.03 4259.2,794.59 C134.2@4269.04,794.59
  L6 w15: v1(3640.71,1330.18) 3640.77,1330.12 3640.77,960.1 3688.01,912.86 4144.71,912.86 4184.08,873.49 4184.08,849.87 4195.89,838.06
  other v1: 4321.87,802.62 4215.57,838.06 4251.01,838.06 4286.44,838.06 4321.87,838.06
+3V3D: C24.2 C25.2 C26.2 C84.2 C85.2 C101.2 C102.2 C103.2 C104.2 C105.2 C106.2 C107.2 C112.2 C113.2 C119.2 C135.2 C136.2 C174.2 C175.2 C176.1 C177.2 FB10.1 FB11.1 FB12.1 FB13.1 IC4.18 IC4.19 IC12.22 IC15.6 IC15.11 IC15.19 IC15.28 IC15.50 IC15.75 IC15.100 IC16.2 IC16.6 IC21.6 IC21.8 IC29.17 J4.4 pad.14 R37.2 S1.A1 S2.A1 S3.A1 | length 16279.3
  L1 w8: IC15.6@2281.4,1678.29 2341.29,1678.29 2345.31,1682.31 2347.98,1682.31 2347.98,1754.87 C104.2@2346.76,1756.09 2346.76,1758.05 2328.09,1776.72 IC15.11@2281.4,1776.72 ; v1(2341.56,1593.96) 2376.99,1593.96 2392.42,1609.39 2392.42,1660.56 2372.41,1680.57 2356.2,1680.57 2349.2,1687.57 C101.2@2349.2,1688.16
  L1 w12: S1.A1@420.3,2156.95 487.23,2223.88 487.23,2452.23 424.24,2515.22 S2.A1@424.24,2519.16 424.24,2523.1 479.35,2578.21 479.35,2808.96 421.36,2866.95 S3.A1@421.36,2870.89 ; IC29.17@803.05,1283.84 803.15,1283.94 829.21,1283.94 829.59,1284.32 870.96,1284.32 C175.2@874.2,1281.09 ; C174.2@867.2,1327.13 874.2,1334.13 C174.2@874.2,1336.09 ; C177.2@874.2,1231.09 874.34,1231.23 874.34,1392.29 913.52,1431.47 938.04,1431.47 946.76,1440.19 FB13.1@946.76,1479.47 947.24,1478.99 v1(988.71,1478.99) ; v1(1022.02,2406.82) 1022.49,2406.34 1075.08,2406.34 IC12.22@1075.56,2405.87 1078.12,2403.3 1118.04,2403.3 1151.79,2369.55 1151.79,2367.65 1158.79,2360.65 C85.2@1215.75,2360.65 1220.12,2365.01 1248.25,2365.01 v1(1249.35,2366.11) ; v1(1091.08,1459.97) 1092.62,1459.97 1096.7,1464.04 1363.32,1464.04 1371.79,1472.51 1378.4,1472.51 ; v1(1312.39,2367.33) 1336.48,2343.24 1336.48,2236.83 1479.35,2093.96 1612.73,2093.96 1619.76,2100.99 1619.76,2127.2 C112.2@1626.04,2133.47 1740.44,2133.47 1740.53,2133.38 IC15.50@1740.53,2120.73 ; v1(1388.97,1682.23) 1388.97,1683.78 1401.69,1696.5 1401.69,1733.9 IC16.2@1404.55,1736.76 ; v1(1389.64,1638.14) 1389.64,1636.59 1378.96,1625.91 IC16.6@1378.96,1505.42 1378.4,1504.85 1378.4,1472.51 ; C102.2@1596.64,1571.21 C113.2@1536.76,1571.21 1535.86,1570.31 1510.82,1570.31 1475.42,1534.91 1475.42,1479.79 1439.98,1444.35 1381.31,1444.35 C119.2@1378.4,1441.44 ; C102.2@1596.76,1571.09 1603.76,1578.09 1610.97,1578.09 1612.75,1579.87 IC15.75@1672.11,1579.87 ; C107.2@1711.76,2196.09 1718.76,2189.09 1718.76,2180.7 1740.53,2158.92 IC15.50@1740.53,2133.47 ; IC15.28@2173.51,2143.77 2173.51,2185.76 C105.2@2184.36,2196.6 ; C105.2@2195.89,2204.2 2195.89,2202.24 2202.89,2195.24 2204.85,2195.24 2226.88,2173.2 2530.03,2173.2 2571.76,2131.48 FB10.1@2571.76,2044.32 2611.67,2044.32 ; v1(2207.7,1381.36) 2207.7,1420.1 2209.76,1422.15 2209.76,1429.09 C103.2@2216.76,1436.09 2213.18,1439.66 2213.18,1488.3 IC15.100@2213.07,1488.41 ; IC15.19@2304.44,1934.12 2347.22,1934.12 C106.2@2349.2,1936.09 2349.2,1905.22 2369.12,1885.3 2585.65,1885.3 2625.02,1924.67 2625.02,2030.97 2611.67,2044.32 ; FB12.1@3014.79,1864.73 3014.79,1967.98 2938.44,2044.32 2611.67,2044.32 ; FB12.1@3026.76,1841.41 3039.62,1828.55 3135.86,1828.55 3214.8,1749.61 3214.8,1733.95 3227.66,1721.09 FB11.1@3228.37,1721.09 ; IC4.19@3865.46,1266.22 3865.46,1256.71 3858.24,1249.49 3848.73,1249.49 3848.73,1224.38 3849.43,1223.68 3849.43,1180.44 3856.6,1173.27 3856.6,1171.31 3863.6,1164.31 C25.2@3865.56,1164.31 C26.2@3920.56,1164.31 3920.82,1164.57 3971.22,1164.57 v1(3971.48,1164.83) ; IC4.19@3886.93,1266.22 3886.93,1256.38 3895.8,1247.5 3913.3,1247.5 3920.3,1240.5 C24.2@3920.3,1239.63 ; C119.2@1378.4,1441.44 1378.4,1472.51 ; C119.2@1378.4,1441.44 1378.4,1440.17 C119.2@1374.31,1436.09 1374.31,1437.35 C119.2@1378.4,1441.44
  L1 w15: C136.2@788.29,632.15 807.88,612.56 905.43,612.56 936.05,643.17 IC21.8@951.79,643.17 ; C136.2@798.13,632.15 811.22,645.24 811.22,669.93 833.57,692.27 C135.2@878.29,692.27 ; v1(841.56,692.39) 849.43,700.26 849.43,881.36 924.24,956.17 1932.11,956.17 2097.43,1121.49 v1(2206.19,1121.49) ; IC21.6@943.03,682.64 939.38,682.64 939.2,682.82 894.28,682.82 891.84,685.27 887.25,685.27 C135.2@880.25,692.27 ; pad.14@991.16,771.13 939.98,771.13 913.62,744.76 913.62,725.63 C135.2@880.25,692.27 ; R37.2@1262.82,849.87 928.17,849.87 878.29,799.99 C135.2@878.29,692.27 ; v1(2206.19,1121.49) v1(2459.67,1121.52) 3128.96,1121.52 3207.7,1042.78 v1(3341.56,1042.78) ; v1(2993.83,1890.51) 3014.53,1869.81 3014.53,1864.42 3015.39,1863.56 3015.39,1855.68 FB12.1@3026.76,1844.32 ; C135.2@878.29,692.27 C135.2@880.25,692.27
  L1 w18: S1.A1@420.3,2153.02 420.3,2151.89 430.98,2141.21 v1(463.61,2141.21)
  L3 w15: v1(2558.09,1467.98) 2558.09,1727.82 2722.05,1891.78 2992.56,1891.78 v1@2995.1,1889.24
  L4 w10: v1(841.56,692.39) 784.84,749.1 784.84,1261.65 833.68,1310.5 v1(873.05,1310.5)
  L4 w12: v1(463.61,2141.21) 462.52,2140.12 462.52,2128.31 369.12,2034.91 369.12,1857.74 273.05,1761.68 J4.4@273.05,1753.02 322.87,1703.2 322.87,1548.57 424.24,1447.2 424.24,975.85 v1(534.47,865.61) ; v1(988.71,1478.99) 971.48,1496.22 971.48,1613.65 806.12,1779 806.12,2324.94 889.1,2407.91 1020.92,2407.91 v1(1022.02,2406.82) ; v1(1388.97,1682.23) 1389.3,1681.89 1389.3,1638.47 v1(1389.64,1638.14)
  L4 w15: v1(2459.67,1121.52) 2558.09,1219.95 v1(2558.09,1467.98) ; v1(3341.56,1042.78) 3936.05,1042.78 3973,1079.73 3973,1162.58 3971.48,1164.09 v1(3971.48,1164.83)
  L6 w12: v1(534.47,865.61) 817.94,865.61 841.56,841.99 v1(841.56,692.39) ; v1(988.71,1478.99) 1072.05,1478.99 v1(1091.08,1459.97) ; v1(1249.35,2366.11) 1249.96,2366.72 1311.77,2366.72 v1(1312.39,2367.33) ; v1(2206.19,1121.49) 2206.94,1122.24 2206.94,1380.61 v1(2207.7,1381.36) 2302.19,1381.36 2341.56,1420.73 v1(2341.56,1593.96)
+3VA: C16.1 C17.2 C27.1 C28.2 C31.1 C32.2 C141.2 C142.2 FB3.1 FB4.1 IC3.20 IC22.6 IC22.8 pad.20 | length 5838.8
  L1 w10: C16.1@4021.19,1790.69 4025.01,1786.87 v1(4077.78,1786.87) ; v1(4097.46,2794.75) 4098.84,2808 4103.69,2812.86 4112.79,2814.19 C32.2@4122.75,2815.65
  L1 w12: IC3.20@3882.31,1792.27 3882.4,1792.36 3947.87,1792.36 C17.2@3951.19,1795.69 4016.19,1795.69 C16.1@4021.19,1790.69 ; IC22.8@4078.76,291.52 4078.67,291.61 4078.67,356.06 C141.2@4075.81,358.92 C141.2@4081.72,364.83 ; C142.2@4089.04,429.63 4108.63,410.04 4118.06,410.04 4118.63,409.47 4143.9,409.47 4162.99,390.38 ; IC22.6@4118.13,291.52 4118.13,316.83 4125.16,323.86 4143.83,323.86 4162.99,343.01 4162.99,390.38 ; FB4.1@4130.76,2875.85 4122.75,2867.85 C32.2@4122.75,2815.65 4125.83,2812.57 4443.94,2812.57 4445.04,2811.47 C28.2@4471.04,2811.47 ; pad.20@4341.56,361.68 4334.53,361.68 4305.83,390.38 4162.99,390.38
  L1 w15: C141.2@4081.72,364.83 4081.72,432.15 C142.2@4089.04,439.47
  L1 w30: C142.2@4089.04,439.47 4089.32,439.76 v3(4089.32,496.83)
  L6 w10: v1(4077.78,1786.87) 3999.04,1786.87 3973.48,1761.32 3332.67,1761.32 3306.12,1734.78 ; v3(4089.32,496.83) 3541.06,496.83 3306.12,731.76 3306.12,1734.78 ; v1(4097.46,2794.75) 3547.12,2794.75 ccw(c3547.12,2553.75) 3306.12,2553.75 3306.12,1734.78
  L6 w12: v1(4097.46,2794.75) 4098.56,2795.84 4100.99,2795.84 4120.79,2815.65 C31.1@4122.75,2815.65 ; v1@4445.04,2811.47 4446.13,2812.57 4446.13,2834.57 4462.65,2851.08 4474.18,2851.08 4487.04,2863.95 FB3.1@4487.04,2866.86 ; v1(4445.39,2810.49) C27.1@4471.39,2810.49
+4V1: C137.2 C138.2 C145.2 C146.2 C149.2 C150.2 IC20.1 IC20.3 IC21.1 IC21.3 IC22.1 IC22.3 IC23.1 IC23.3 L4.2 pad.16 R47.2 | length 6105.2
  L1 w12: IC23.3@433.29,692.47 420.4,692.47 418.2,690.27 380.25,690.27 353.13,717.39 C146.2@343.29,717.39 359.67,733.76 422.69,733.76 424.62,731.84 IC23.1@433.29,731.84 ; IC21.1@1039.3,643.08 1043.95,638.43 1089.73,638.43 1113.45,662.15 1092.74,682.86 1043.17,682.86 1042.95,682.64 IC21.3@1039.3,682.64 ; R47.2@3293.29,254.71 3295.25,254.71 3322.47,227.49 v1(3323.16,227.49) ; v1(3849.21,229.12) 3875.42,229.12 L4.2@3933.29,286.99 ; C145.2@4077.58,122.15 4077.58,199.28 4078.67,200.37 IC22.1@4078.67,204.02 ; C137.2@4079.9,601.5 4079.9,658.33 4081.94,660.38 IC20.1@4081.94,674.04 ; C145.2@4093.29,131.99 4121.26,159.97 4121.26,189.99 4118.13,193.12 IC22.3@4118.13,212.78 ; C137.2@4093.92,587.47 4093.92,597.32 4123.39,626.79 4123.39,655.41 4121.41,657.39 4121.41,673.95 IC20.3@4121.31,674.04 IC20.3@4121.31,665.37
  L1 w15: pad.16@215.57,723.88 336.79,723.88 cw(c336.79,717.39) C146.2@343.29,717.39 345.04,715.64 v3(345.04,663.47) ; C138.2@1123.29,662.15 1141.38,644.06 1175.05,644.06 1177.64,641.47 v3(1181.04,641.47) ; v3(3488.04,634.47) C149.2@3579.04,634.47
  L1 w35.43: C149.2@3579.04,634.47 C150.2@3819.04,634.47 4032.04,634.47 4068.04,598.47 ; C150.2@3866.27,634.19 3887.03,613.43 3887.03,388.41 L4.2@3933.29,342.15 3933.29,286.99 3933.29,205.34 4006.64,131.99 4085.42,131.99 4093.29,124.12 C145.2@4093.29,122.15
  L3 w15: v3(345.04,663.47) 348.44,663.47 357.44,654.47 475.04,654.47 503.68,625.83 1094.4,625.83 1110.04,641.47 v3(1181.04,641.47) 2528.04,641.47 2571.04,684.47 2707.74,684.47 2757.74,634.47 v3(3488.04,634.47)
  L6 w12: v1(3323.16,227.49) 3323.97,228.31 3848.4,228.31 v1(3849.21,229.12)
+5V8: C129.2 C130.2 C131.2 C132.2 C153.2 C154.2 C161.2 IC25.5 IC25.7 IC25.8 IC26.5 IC26.7 IC26.8 L3.2 R42.2 | length 2914.4